# Altium PCB board.PcbDoc
Units mm, origin at the board's own origin, x right, y up, seen from the top; angles counter-clockwise.
Board outline 9 x 18 mm, 2 copper layers (Top Layer, Bottom Layer), stack 1.499 mm thick; 4 components, 5 nets, 8 pads, 0 vias.
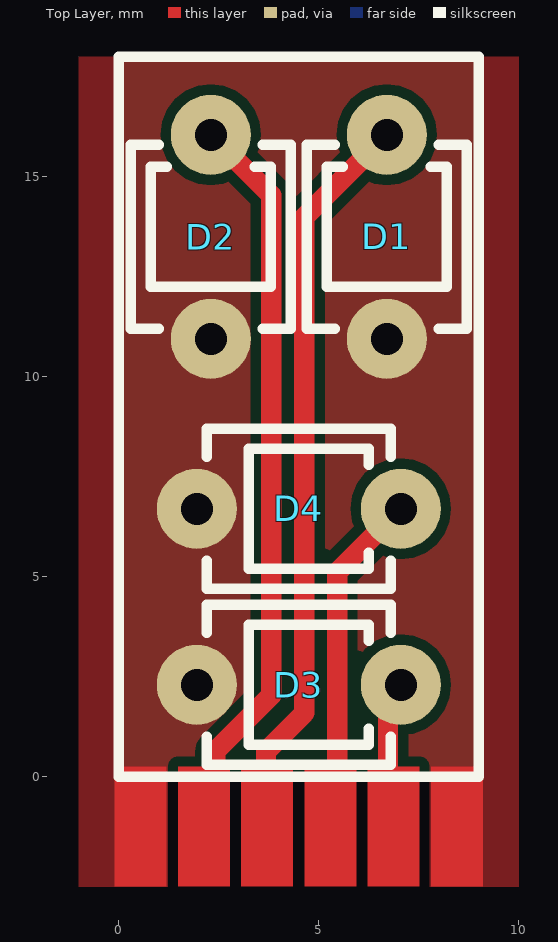
[diagram p0: Top Layer view]
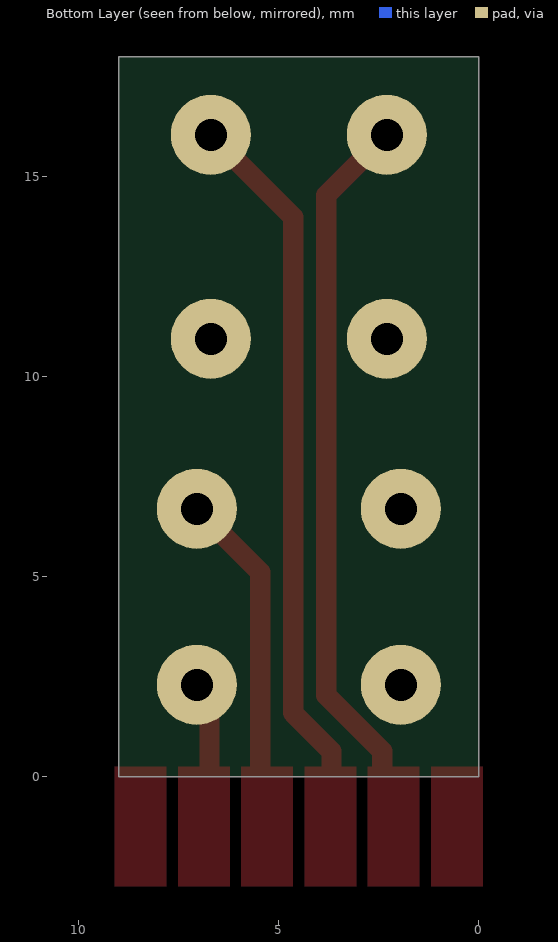
[diagram p1: Bottom Layer view, seen from below]

## Layer stack, top to bottom
Top Solder: solder mask 0.0102, Solder Resist, Dk 3.5
Top Layer: signal copper 0.0356
Dielectric 1: dielectric 1.428, FR-4, Dk 4.8
Bottom Layer: signal copper 0.0356
Bottom Solder: solder mask 0.0102, Solder Resist, Dk 3.5

## Board outline
0,0 0,18 9,18 9,0

## Design rules (kind name [scope] priority, off if disabled: settings)
Clearance [All] p1: gap=0.127 ignorepadtopadclearanceinfootprint=FALSE except(0.254: Arc-Fill Arc-Poly Arc-Region Track-Fill Track-Poly Track-Region SMDPad-Fill SMDPad-Poly SMDPad-Region THPad-Fill THPad-Poly THPad-Region Via-Fill Via-Poly Via-Region Fill-Fill Fill-Poly Fill-Region Poly-Poly Poly-Region Region-Region)
ComponentClearance [All] p1: gap=0.001 collisioncheckmode=3 verticalgap=0.254 showdistances=FALSE
PolygonConnect [All] p1: connectstyle=Direct reliefconductorwidth=0.254 reliefentries=4 polygonreliefangle="90 Angle" airgapwidth=0.254
RoutingVias [All] p1: holewidth=0.711 width=1.27 viastyle="Through Hole" minholewidth=0.711 minwidth=1.27 maxholewidth=0.711 maxwidth=1.27
SolderMaskExpansion [All] p1: expansion=0.102
Width [All] p1: maxlimit=500 minlimit=0.127 preferedwidth=0.254
29 further rules are at their usual default settings.

## Classes and differential pairs
component class main: D2 D3 D4

## Components (designator, comment, footprint, x,y, rotation, side; value= is the part's Value field where it differs from the comment)
D1 "Diode" PIN-diode 6.7,13.5 r90 top
D2 "Diode" PIN-diode 2.3,13.5 r90 top
D3 "Diode" PIN-diode 4.5,2.3 r0 top
D4 "Diode" PIN-diode 4.5,6.7 r0 top

## Footprints (in the part's own frame and the unit in brackets; to place one, negate y for a bottom-side part, rotate by r counter-clockwise, add the part's x,y. Pads: shape width x height; smd on the part's side, far side on the other; paste and mask are expansions set on the pad)
PIN-diode [mm]
  round 2 hole 0.8: 1(-2.55,0) 2(2.55,0)
  silkscreen extent -2.3,-2 2.3,2, body extent -2.25,-2.12 2.25,2.12, height 2

## Part data
D1 D2 D3 D4: "Default Diode", Code_JEDEC=DO-214-AB, LatestRevisionDate=17-Jul-2002, LatestRevisionNote="Re-released for DXP Platform.", PackageDescription="DO-214-AB/SMC; 2 C-Bend Leads; Body 7.9 x 5.9 mm, inc. leads (LxW)", PackageReference=SMC, PackageVersion=Sep-1996, Published=8-Jun-2000, Publisher="Altium Limited"

## Nets (pads, with @x,y where several pads share a name; then routed paths per layer and width w, separated by ;. In a path a pad name is that pad's centre, name@x,y a point inside that pad or via, vN(x,y) a via of type N, cw(c..) or ccw(c..) an arc to the next point about the centre after c; other vN are vias at no path point)
D1: D1.2 | length 18.6
  Top Layer w0.508: 3.683,-1.27 3.683,0.635 4.641,1.593 4.641,13.991 D1.2
D2: D2.2 | length 17.9
  Top Layer w0.508: 2.159,-0.508 2.413,-0.254 2.413,0.635 3.81,2.032 3.81,14.54 D2.2
D3: D3.2 | length 3.3
  Top Layer w0.508: 6.731,-0.889 6.731,1.981 D3.2
D4: D4.2 | length 8.7
  Top Layer w0.508: 5.207,-1.27 5.461,-1.016 5.461,5.111 D4.2
GND: D1.1 D2.1 D3.1 D4.1

## Polygon pours and split planes (outlines as drawn)
GND on Top Layer (solid, remove dead copper, pour order 0): -1,-2.746 -1,18 10,18 10,-2.746

## Other copper
Top Layer:
  region net GND: 9.103,0.254 7.803,0.254 7.803,-2.746 9.103,-2.746
  rectangle net D1: 3.059,-2.746 4.359,0.254
  rectangle net GND: -0.103,-2.746 1.197,0.254
  rectangle net D2: 1.478,-2.746 2.778,0.254
  rectangle net D3: 6.222,-2.746 7.522,0.254
  rectangle net D4: 4.641,-2.746 5.941,0.254

## Silkscreen, mask and mechanical layers (free items; w line width, h text height)
Top Overlay:
  the board outline again, w0.254